# Altium PCB dc-breakout-board.PcbDoc
Units mil, origin at the board's own origin, x right, y up, seen from the top; angles counter-clockwise.
Board outline 6000 x 4000 mil, 2 copper layers (Top Layer, Bottom Layer); 7 components, 10 nets, 20 pads, 0 vias.
Unrouted connection lines stored in the file: 10.
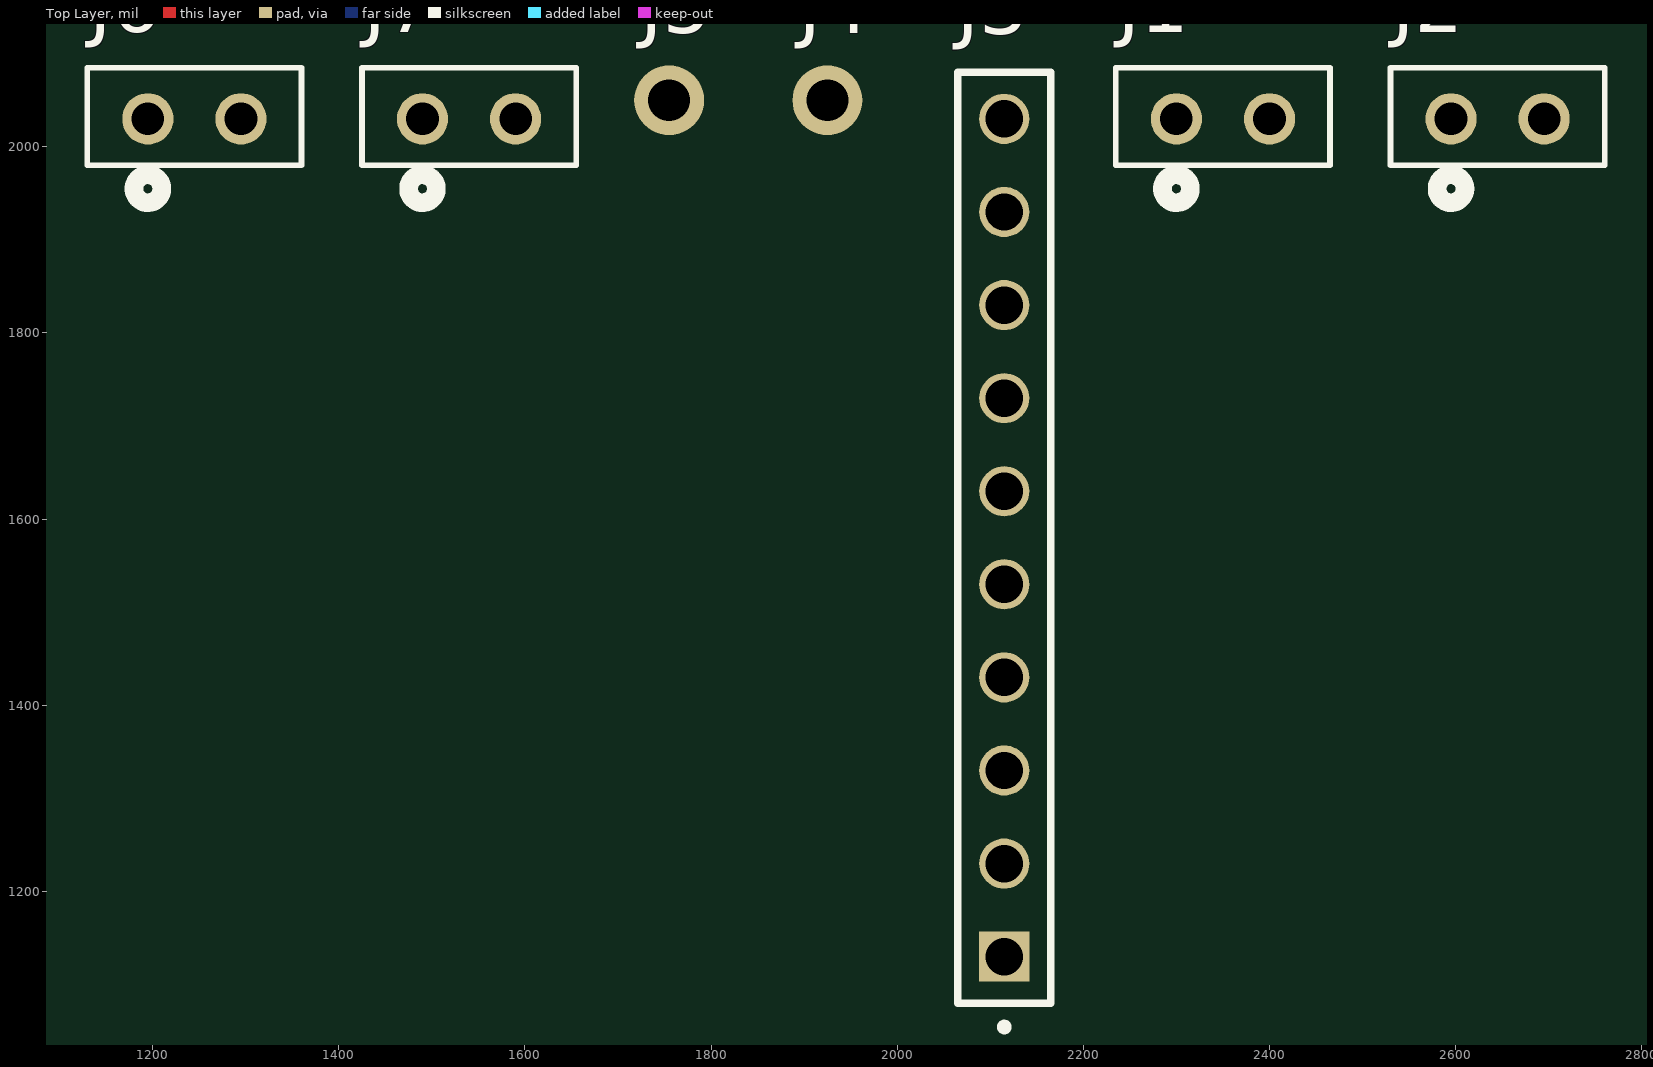
[diagram p0: Top Layer view]
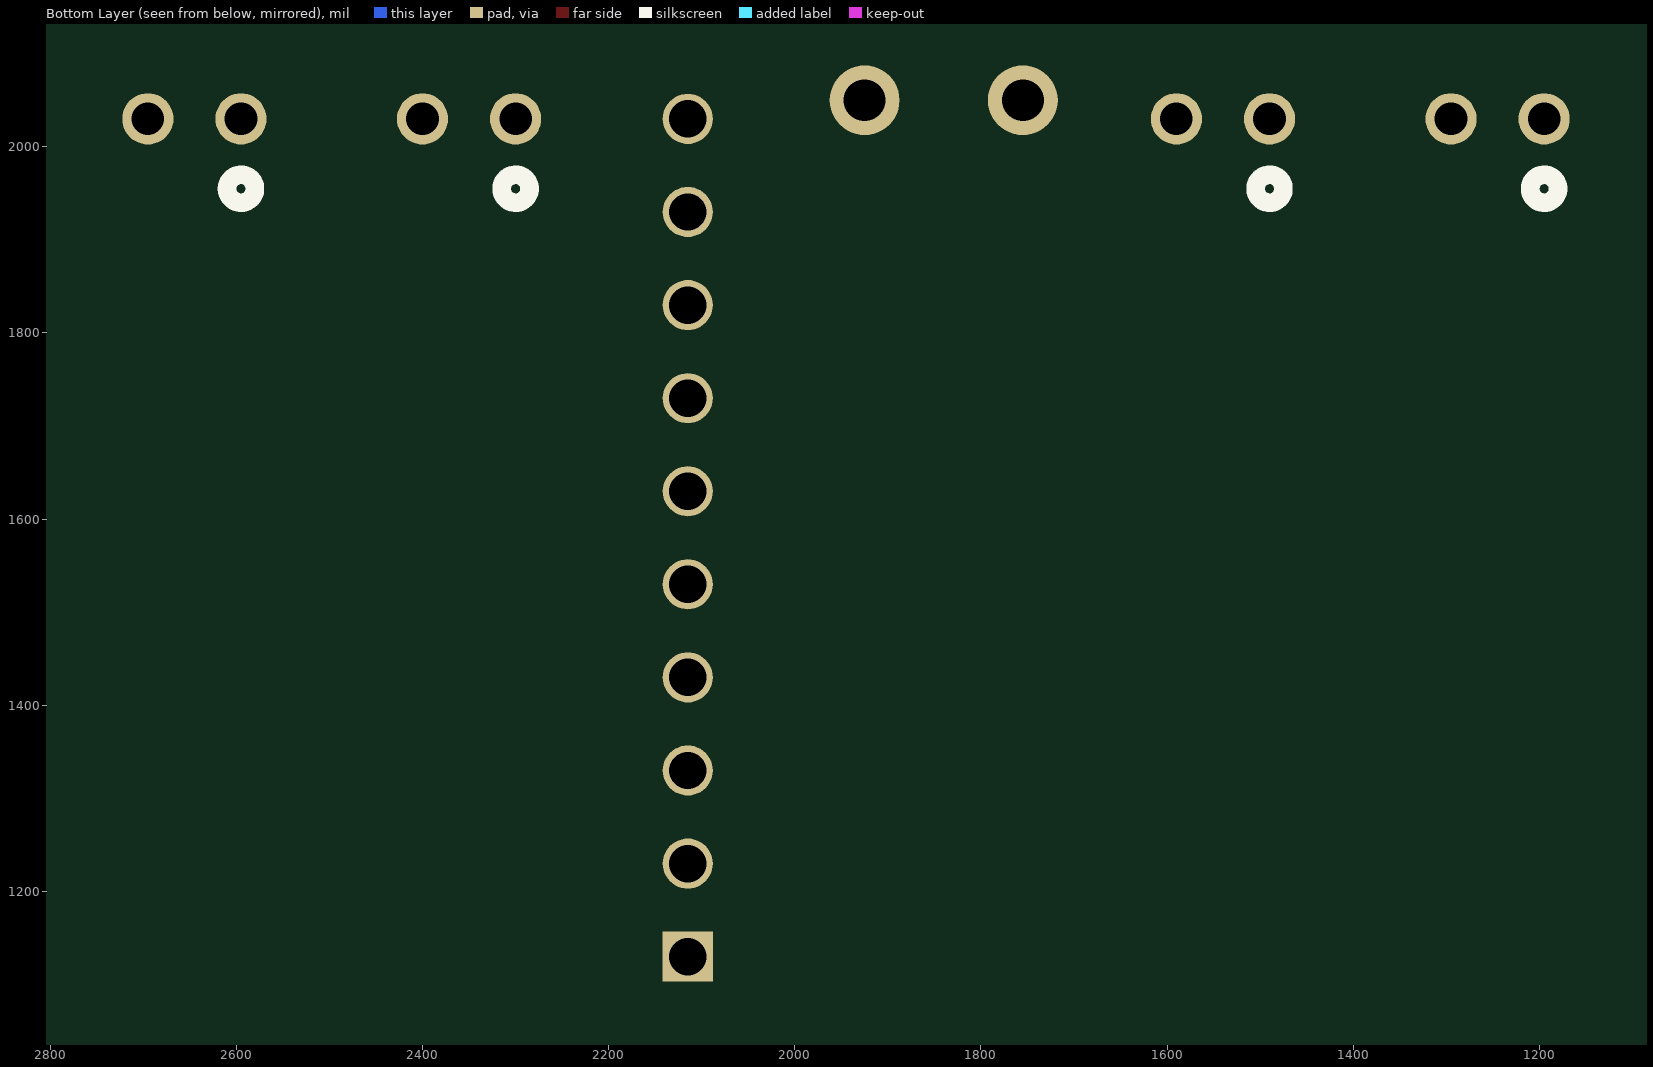
[diagram p1: Bottom Layer view, seen from below]

## Layer stack, top to bottom
Top Solder: solder mask 0.4, Solder Resist, Dk 3.5
Top Layer: signal copper 1.4
Dielectric 1: dielectric 12.6, FR-4, Dk 4.8
Bottom Layer: signal copper 1.4
Bottom Solder: solder mask 0.4, Solder Resist, Dk 3.5

## Board outline
1000,1000 7000,1000 7000,5000 1000,5000

## Design rules (kind name [scope] priority, off if disabled: settings)
Clearance [All] p1: gap=10 ignorepadtopadclearanceinfootprint=FALSE
PolygonConnect [All] p1: connectstyle=Relief reliefconductorwidth=10 reliefentries=4 polygonreliefangle="90 Angle" airgapwidth=10
RoutingVias [All] p1: holewidth=28 width=50 viastyle="Through Hole" minholewidth=28 minwidth=50 maxholewidth=28 maxwidth=50
SolderMaskExpansion [All] p1: expansion=4 istentingtop=FALSE
Width [All] p1: maxlimit=10 minlimit=10 preferedwidth=10
30 further rules are at their usual default settings.

## Components (designator, comment, footprint, x,y, rotation, side; value= is the part's Value field where it differs from the comment)
J1 "TSW-102-07-G-S" TSW-102-07-G-S-iceberg 2350,2030 r0 top
J2 "TSW-102-07-G-S" TSW-102-07-G-S-iceberg 2645,2030 r0 top
J3 "TSW-110-07-G-S-topside" SAMTEC_TSW-110-07-G-S 2115,1580 r90 top
J4 "Single Pin" "Single PC Pin" 1925,2050 r0 top
J5 "Single Pin" "Single PC Pin" 1755,2050 r0 top
J6 "TSW-102-07-G-S" TSW-102-07-G-S-iceberg 1245,2030 r0 top
J7 "TSW-102-07-G-S" TSW-102-07-G-S-iceberg 1540,2030 r0 top

## Footprints (in the part's own frame and the unit in brackets; to place one, negate y for a bottom-side part, rotate by r counter-clockwise, add the part's x,y. Pads: shape width x height; smd on the part's side, far side on the other; paste and mask are expansions set on the pad)
SAMTEC_TSW-110-07-G-S [mm]
  rect 1.37x1.37 / inner round 1.37 / far side rect 1.37x1.37 hole 1.02: 01(-11.43,0)
  round 1.37 hole 1.02: 02(-8.89,0) 03(-6.35,0) 04(-3.81,0) 05(-1.27,0) 06(1.27,0) 07(3.81,0) 08(6.35,0) 09(8.89,0) 10(11.43,0)
  silkscreen extent -13.45,-1.27 12.7,1.27, body extent -12.75,-1.3 12.78,1.24, height 1.34
"Single PC Pin" [mil]
  round 75 hole 45: 1(0,0)
TSW-102-07-G-S-iceberg [mil]
  round 55 / inner round 60 / far side round 55 hole 35 paste-99999 mask+0: 1(-50,0) 2(50,0)
  silkscreen extent -115,-90 115,55, body extent -105,-50 100,50, height 55

## Part data
J1 J2 J6 J7: library part TSW-102-07-G-S-iceberg, "No Description Available", Mfr_Name="Samtec Inc", Copyright="Copyright (C) 2024 Ultra Librarian. All rights reserved.", Manufacturer_Part_Number=TSW-102-07-G-S, RefDes=RefDes, Type=DEV
J3: Package=None, Availability=Unavailable, MF="Samtec Inc.", MP=TSW-110-07-G-S, Price=None
J4 J5: library part "Single PC Pin", Supplier Part Number 1=575-2617001340000, Supplier 1=Mouser

## Nets (pads, with @x,y where several pads share a name; then routed paths per layer and width w, separated by ;. In a path a pad name is that pad's centre, name@x,y a point inside that pad or via, vN(x,y) a via of type N, cw(c..) or ccw(c..) an arc to the next point about the centre after c; other vN are vias at no path point)
NetJ1_1: J1.1 J3.02
NetJ1_2: J1.2 J3.03
NetJ2_1: J2.1 J3.08
NetJ2_2: J2.2 J3.09
NetJ3_01: J3.01 J4.1
NetJ3_04: J3.04 J6.2
NetJ3_05: J3.05 J6.1
NetJ3_06: J3.06 J7.2
NetJ3_07: J3.07 J7.1
NetJ3_10: J3.10 J5.1